# Altium PCB RHD2164_USBC.PcbDoc
Units mil, origin at the board's own origin, x right, y up, seen from the top; angles counter-clockwise.
Board outline 1036 x 1356 mil, 6 copper layers (Top Layer, Ground Plane 1, Third Layer, Fourth Layer, Ground Plane 2, Bottom Layer), stack 58.425 mil thick; 12 components, 76 nets, 224 pads, 85 vias.
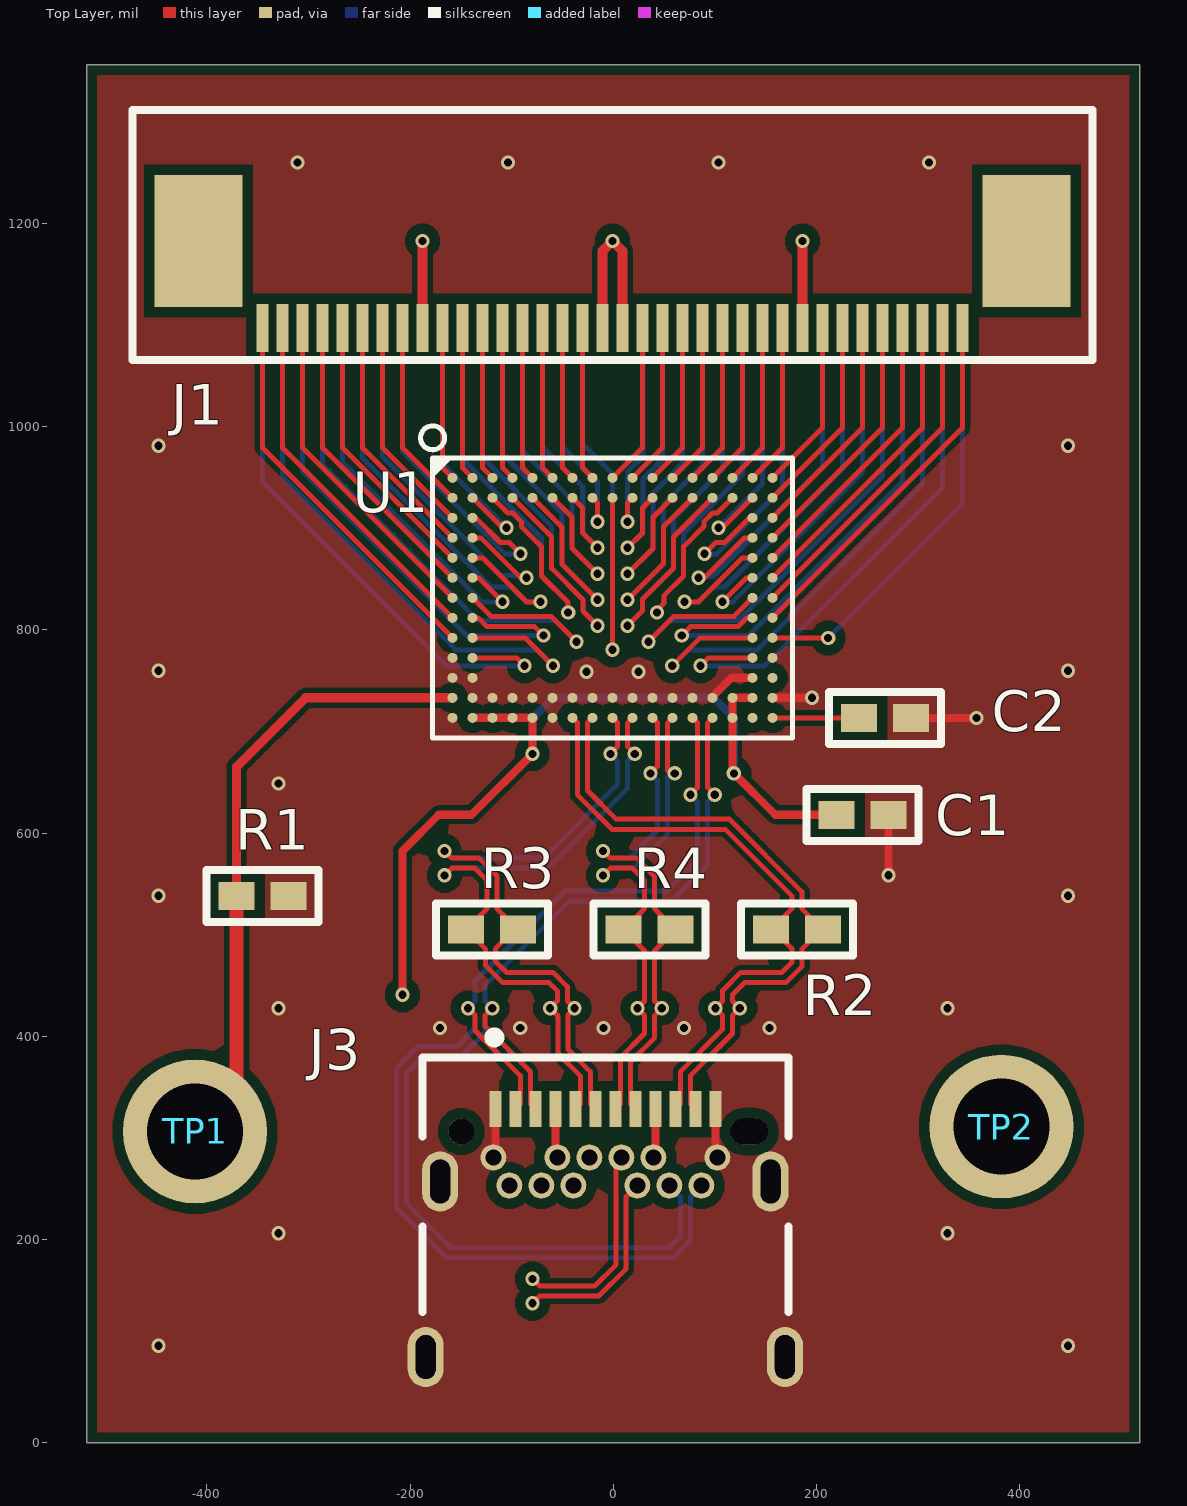
[diagram p0: Top Layer view]
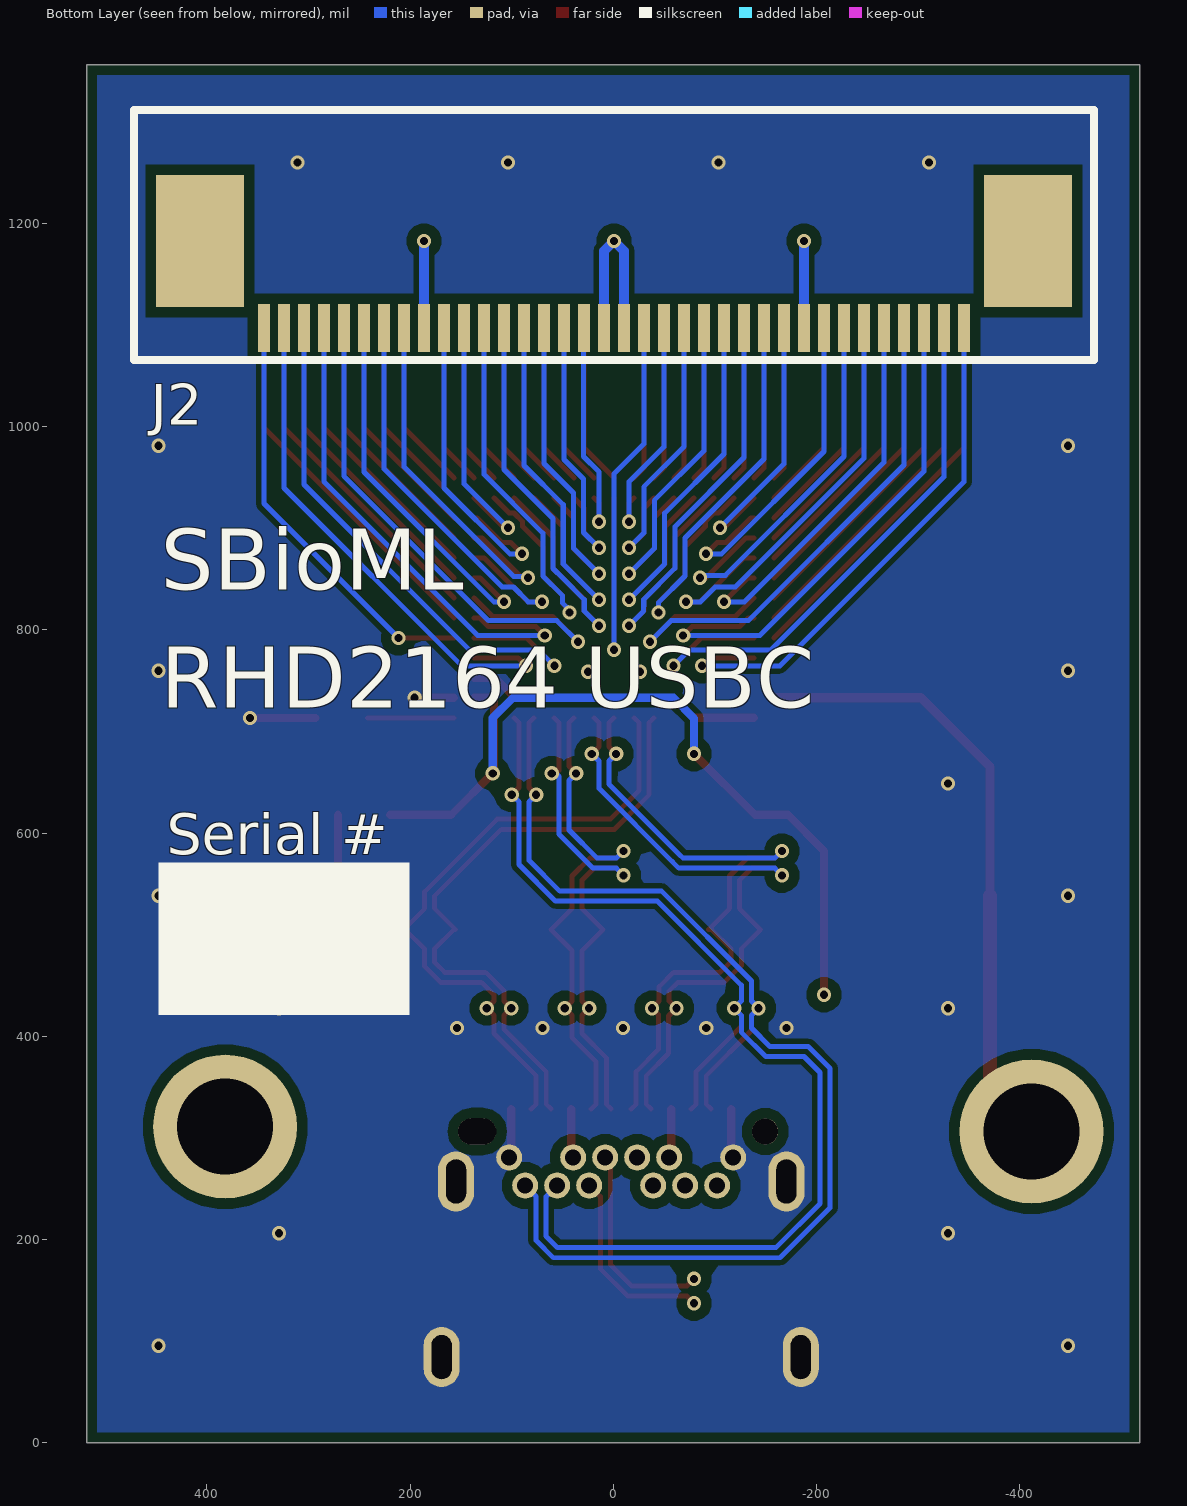
[diagram p1: Bottom Layer view, seen from below]
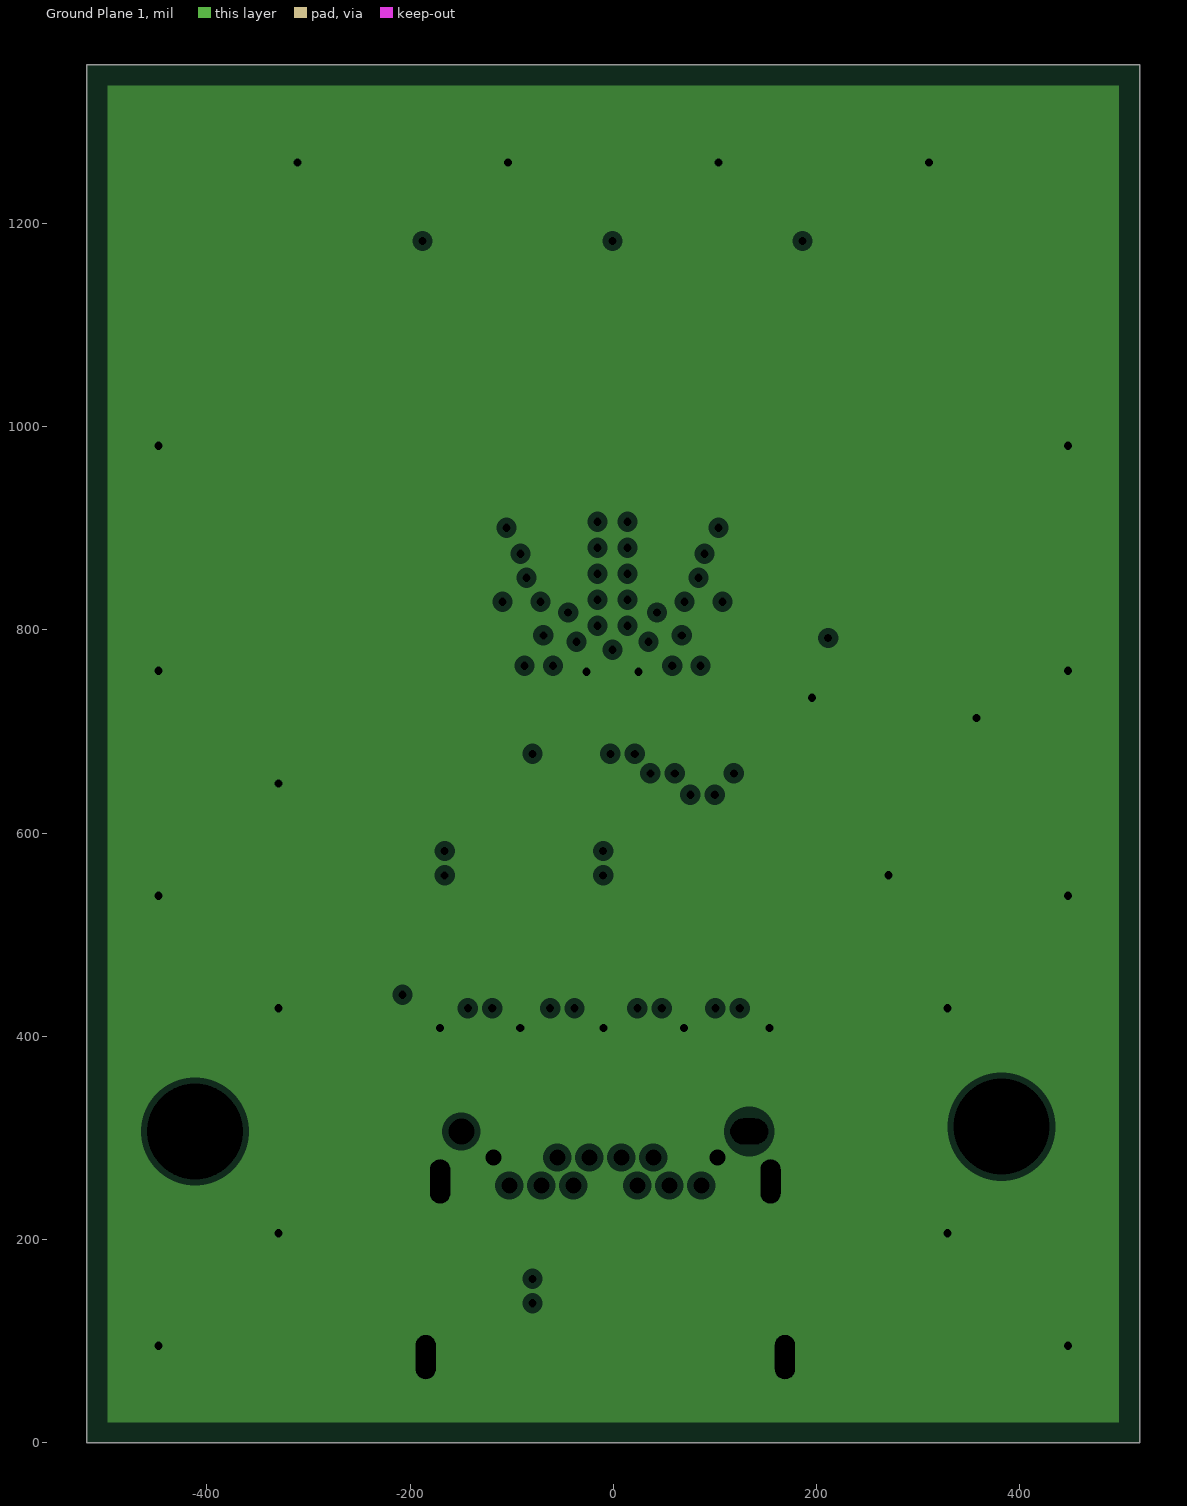
[diagram p2: Ground Plane 1, clearances drawn from the general rule]
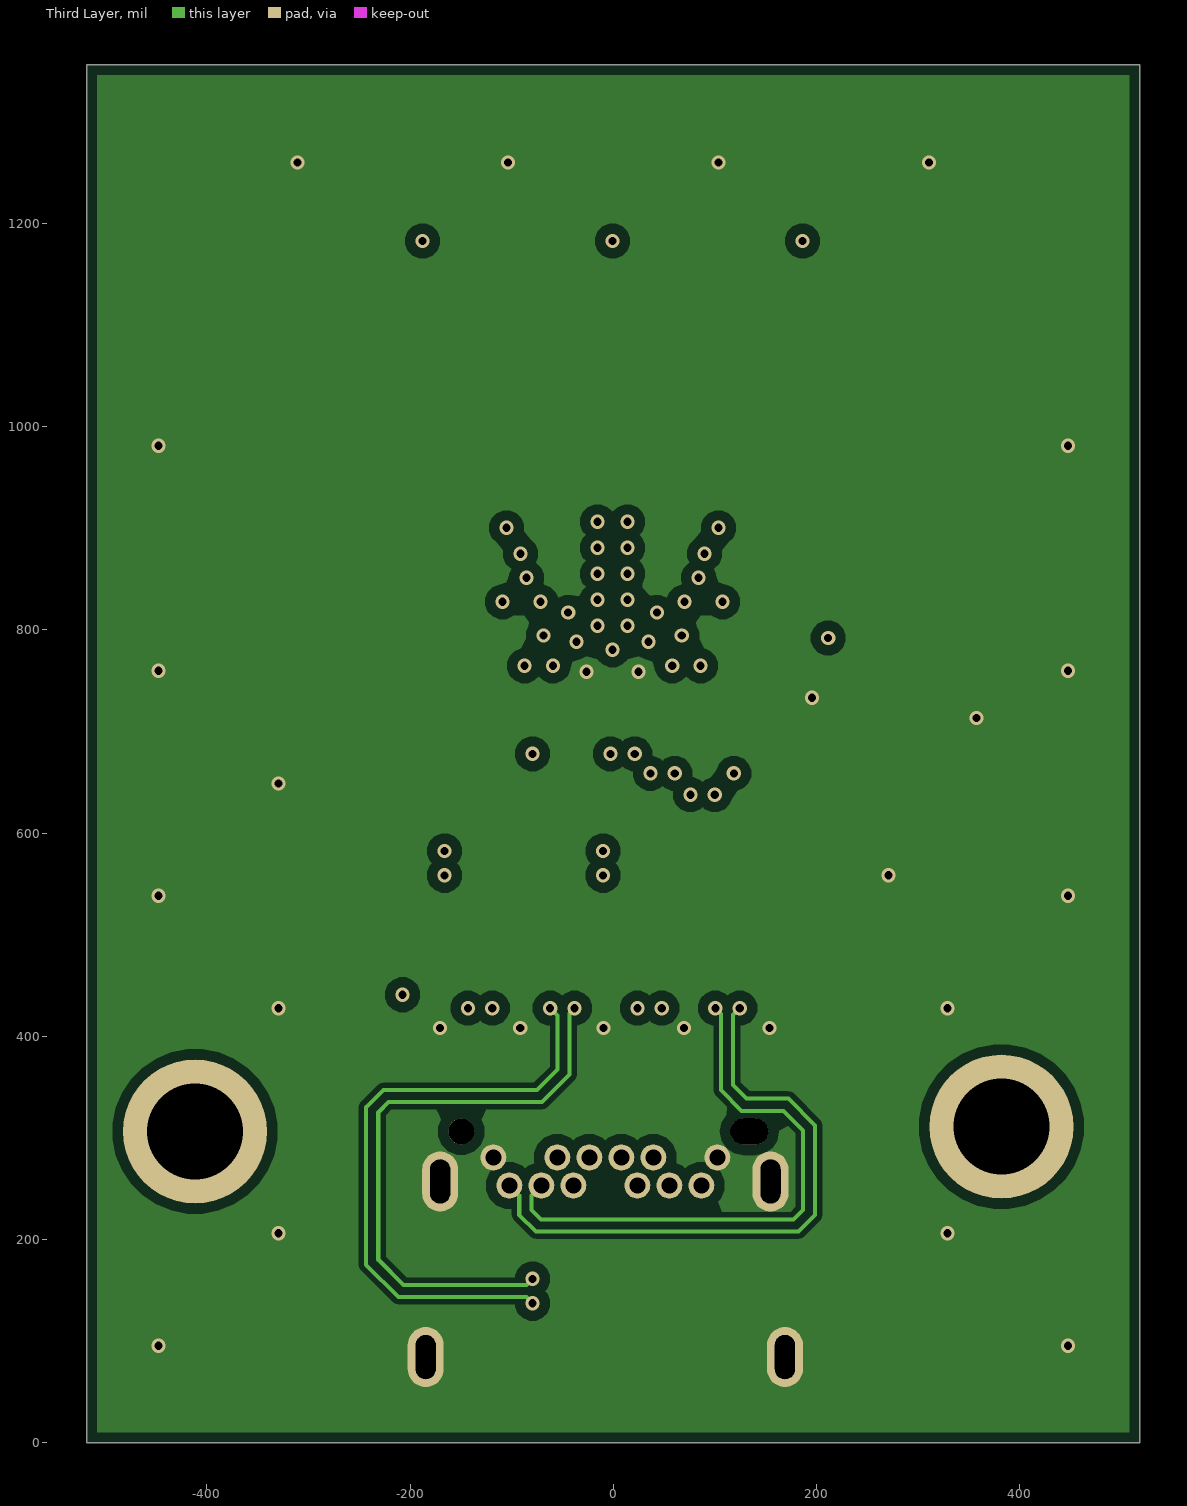
[diagram p3: Third Layer]
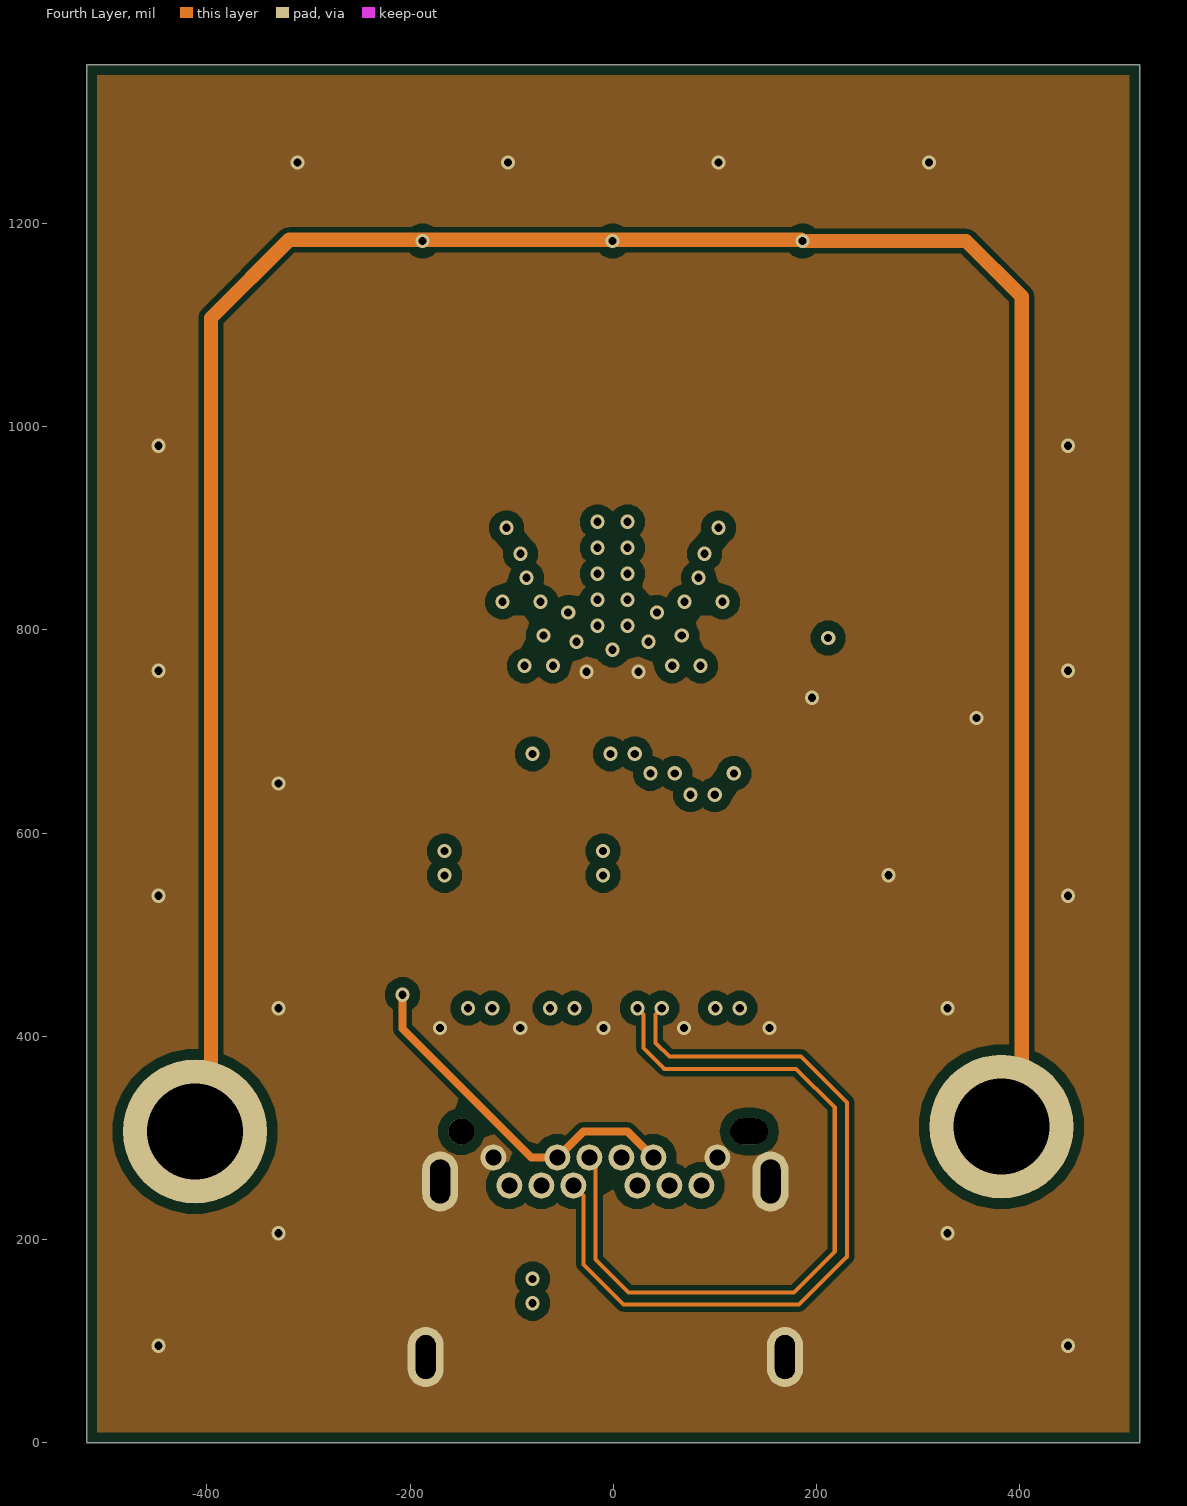
[diagram p4: Fourth Layer]
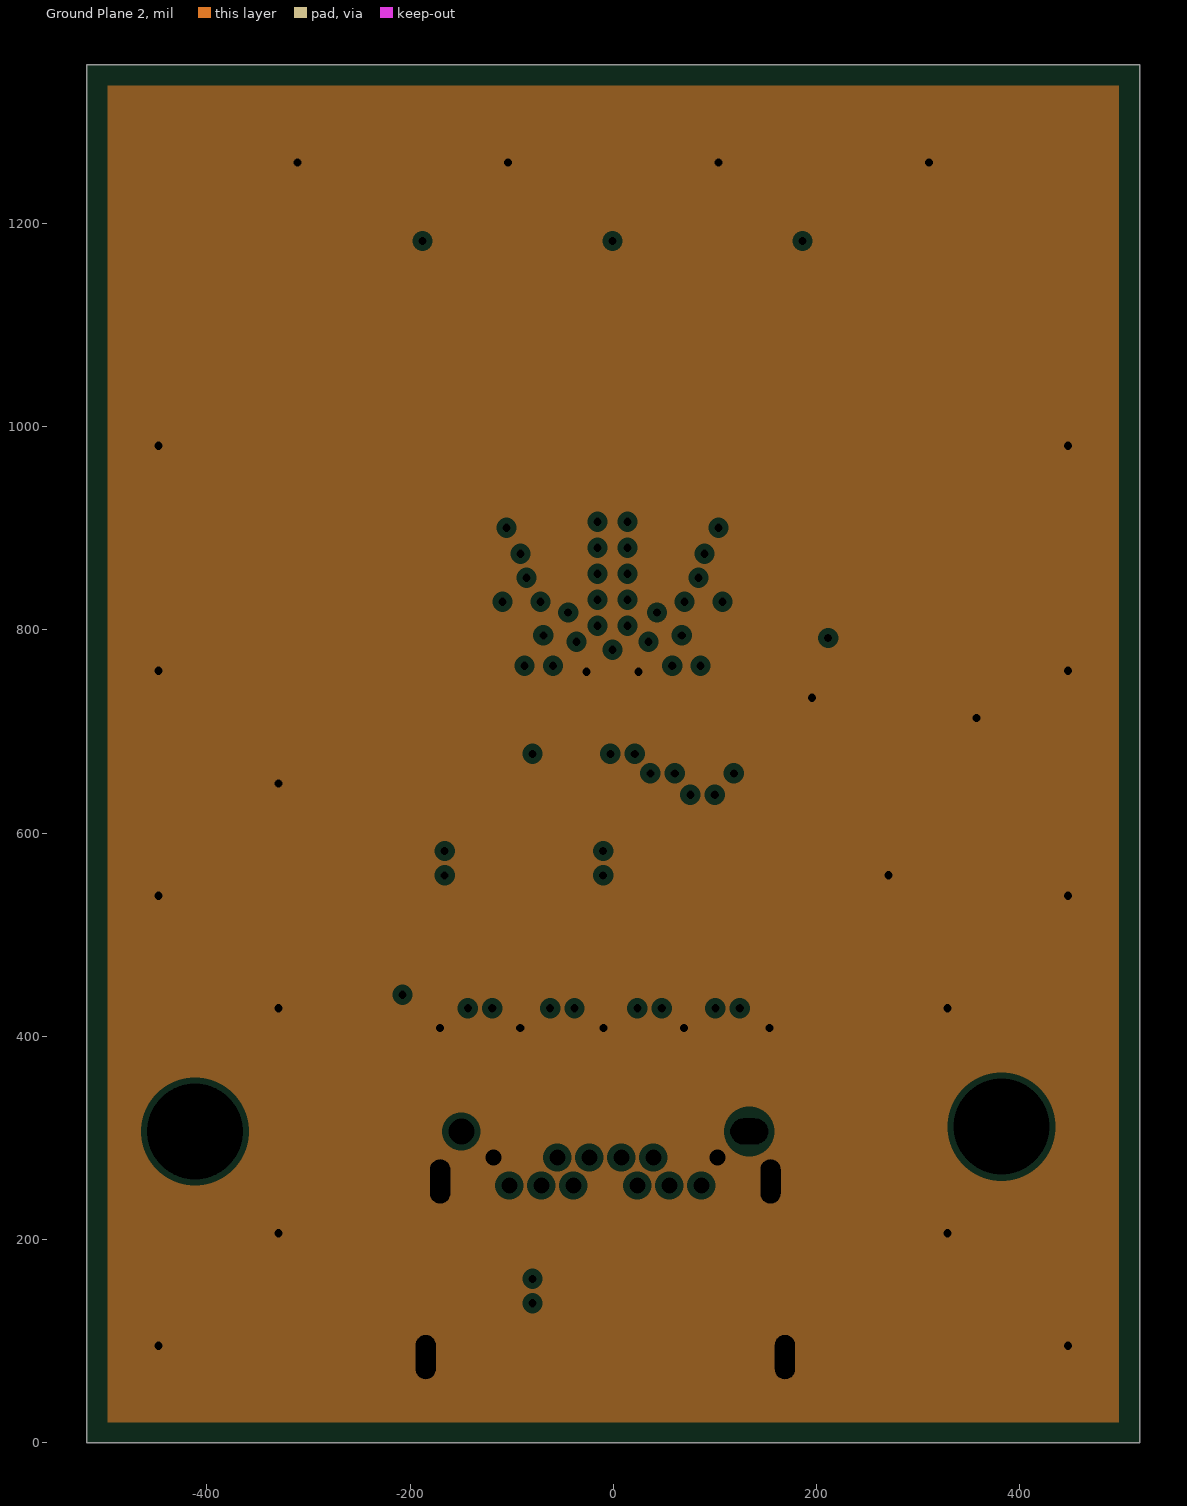
[diagram p5: Ground Plane 2, clearances drawn from the general rule]

## Layer stack, top to bottom
Top Solder: solder mask 0.3937, Solder Resist, Dk 3.5
Top Layer: signal copper 1.378
Dielectric 4: prepreg 4.7047, 2116 RC58%, Dk 4.45
Ground Plane 1: plane copper 1.378, net GND
Dielectric 2: core 16.929, Core, Dk 4.6
Third Layer: signal copper 1.378
Dielectric 1: prepreg 6.8898, 7628 RC46%, Dk 4.74
Fourth Layer: signal copper 1.378
Dielectric 3: core 16.929, Core, Dk 4.6
Ground Plane 2: plane copper 1.378, net GND
Dielectric 5: prepreg 4.7047, 2116 RC58%, Dk 4.45
Bottom Layer: signal copper 1.378
Bottom Solder: solder mask 0.3937, Solder Resist, Dk 3.5

## Board outline
-518,0 -518,1356 518,1356 518,0

## Design rules (kind name [scope] priority, off if disabled: settings)
AcuteAngle [All] p1: minimum=4.50000000000000E+0001 checktracksonly=FALSE
BoardOutlineClearance [All] p1: gap=10 ignorepadtopadclearanceinfootprint=FALSE
Clearance [All] p1: gap=10 ignorepadtopadclearanceinfootprint=TRUE except(5: Arc-Arc Arc-Track Arc-SMDPad Arc-THPad Arc-Via Arc-Fill Arc-Poly Arc-Region Arc-Text Arc-Hole Track-Track Track-SMDPad Track-THPad Track-Via Track-Fill Track-Poly Track-Region Track-Text Track-Hole)
ComponentClearance [All] p1: gap=4 collisioncheckmode=3 verticalgap=4 showdistances=FALSE
DiffPairsRouting [All] p1: maxlimit=8 minlimit=5 mostfreqgap=8 toplayer_maxgap=5 toplayer_prefgap=5 toplayer_minwidth=4.9 toplayer_maxwidth=4.9 toplayer_prefwidth=4.9 midlayer2_mingap=8 midlayer2_minwidth=4 midlayer2_maxwidth=4 midlayer2_prefwidth=4 midlayer3_mingap=8 midlayer3_minwidth=4 midlayer3_maxwidth=4 midlayer3_prefwidth=4 bottomlayer_maxgap=5 bottomlayer_prefgap=5 bottomlayer_minwidth=4.9 bottomlayer_maxwidth=4.9 bottomlayer_prefwidth=4.9 impedanceprofiledriven=TRUE impedanceprofileid={EA2CEC0D-C804-4875-A771-53543DD9646E} impedanceprofilevalue=100.000000 maxuncoupledlength=200
HoleSize [All] p1: absolutevalues=TRUE maxlimit=1000 minlimit=6 maxpercent=80.000 minpercent=20.000
HoleToHoleClearance [All] p1: gap=8 allowstackedmicrovias=FALSE
MatchedLengths [All] p1: tolerance=50 checknetsindiffpair=TRUE checkdiffpairvsdiffpair=FALSE checkxsignals=FALSE checkothers=FALSE
MinimumAnnularRing [All] p1: minimumring=3
MinimumSolderMaskSliver MinimumSolderMaskSliver_U1 [HasFootprint('RHD2164_BGA')] p1: minsoldermaskwidth=1
MinimumSolderMaskSliver [All] p2: minsoldermaskwidth=4
PlaneClearance [All] p1: clearance=6
PlaneConnect [All] p1: planeconnectstyle=Direct reliefexpansion=20 reliefentries=4 reliefconductorwidth=10 reliefairgap=10
PolygonConnect [All] p1: connectstyle=Direct reliefconductorwidth=8 reliefentries=4 polygonreliefangle="90 Angle" airgapwidth=4
RoutingVias [All] p1: holewidth=8 width=14 viastyle="Through Hole" minholewidth=6 minwidth=14 maxholewidth=8 maxwidth=14
SilkToSilkClearance [All] p1: silktosilkclearance=4
SilkToSolderMaskClearance [IsPad] p1: minsilkscreentomaskgap=2 clearancetoexposedcopper=FALSE
SolderMaskExpansion SolderMaskExpansion_Vias [IsVia] p1: expansion=-10 istentingtop=TRUE
SolderMaskExpansion [All] p2: expansion=2 istentingtop=FALSE
SupplyNets "Schematic Supply Nets_1" [InNet('GND')] p1: voltage=0.000
SupplyNets "Schematic Supply Nets" [InNet('VCC')] p2: voltage=0.000
Width Width_Power [InNetClass('Power')] p1: maxlimit=20 minlimit=6 preferedwidth=8
Width [All] p2: maxlimit=15 minlimit=5 preferedwidth=5 minimp=50.000000 maximp=50.000000 favimp=50.000000
21 further rules are at their usual default settings.

## Classes and differential pairs
component class RHD2164_USBC: C1 C2 J1 J2 J3 R1 R2 R3 R4 U1
differential pair RHD2216_SCLK: +RHD2216_SCLK_P -RHD2216_SCLK_N
differential pair RHD2216_MOSI: +RHD2216_MOSI_P -RHD2216_MOSI_N
differential pair RHD2216_MISO: +RHD2216_MISO_P -RHD2216_MISO_N
differential pair RHD2216_CSN: +RHD2216_CSN_P -RHD2216_CSN_N

## Components (designator, comment, footprint, x,y, rotation, side; value= is the part's Value field where it differs from the comment)
C1 "Value" 0402_CAPACITOR 245.37,618.03 r180 top
C2 "Value" 0402_CAPACITOR 267.51,713.15 r0 top
J1 "3-2492104-6" CON_ZIF_RA_36POS -0.69,1097.32 r180 top locked
J2 "3-2492104-6" CON_ZIF_RA_36POS -0.69,1097.32 r0 bottom locked
J3 "217183-0001" FP-217183-0001-MFG -7.82,178.94 r0 top locked
R1 "Value" 0402_Resistor -345.18,538.27 r180 top
R2 "Value" 0402_Resistor 180.69,505 r180 top
R3 "Value" 0402_Resistor -119.31,505 r0 top
R4 "Value" 0402_Resistor 35.69,505 r0 top
TP1 "TP_Small" TP_Small_M2 -411.68,306.3 r0 top
TP2 "TP_Small" TP_Small_M2 381.98,311.02 r0 top
U1 "Intan Technologies RHD2164 chip, BGA package (9x7mm 104-pin)" RHD2164_BGA -0.69,831.58 r0 top locked

## Footprints (in the part's own frame and the unit in brackets; to place one, negate y for a bottom-side part, rotate by r counter-clockwise, add the part's x,y. Pads: shape width x height; smd on the part's side, far side on the other; paste and mask are expansions set on the pad)
0402_CAPACITOR [mm]
  rect 0.9x0.7 smd: 1(-0.65,0) 2(0.65,0)
  silkscreen extent -1.4,-0.65 1.4,0.65
0402_Resistor [mm]
  rect 0.9x0.7 smd: 1(-0.65,0) 2(0.65,0)
  silkscreen extent -1.4,-0.65 1.4,0.65
CON_ZIF_RA_36POS [mm] "3-2492104-6 / 36 Position FPC Connector Contacts, Bottom 0.020\" (0.50mm) Surface Mount, Right Angle"
  rect 0.3x1.2 smd mask+0.025: 1(-8.75,0) 2(-8.25,0) 3(-7.75,0) 4(-7.25,0) 5(-6.75,0) 6(-6.25,0) 7(-5.75,0) 8(-5.25,0) 9(-4.75,0) 10(-4.25,0) 11(-3.75,0) 12(-3.25,0) 13(-2.75,0) 14(-2.25,0) 15(-1.75,0) 16(-1.25,0) 17(-0.75,0) 18(-0.25,0) 19(0.25,0) 20(0.75,0) 21(1.25,0) 22(1.75,0) 23(2.25,0) 24(2.75,0) 25(3.25,0) 26(3.75,0) 27(4.25,0) 28(4.75,0) 29(5.25,0) 30(5.75,0) 31(6.25,0) 32(6.75,0) 33(7.25,0) 34(7.75,0) 35(8.25,0) 36(8.75,0)
  rect 2.2x3.3 smd mask+0.025: M1(-10.35,-2.17) M2(10.35,-2.17)
  silkscreen extent -12,-5.45 12,0.8
FP-217183-0001-MFG [mm]
  rrect100% 0.9x1.5 hole 1.1 slot 0.5 at 0 deg paste-2539.97 mask+0: 1(-4.13,1.985) 2(4.13,1.985) 3(-4.49,-2.405) 4(4.49,-2.405)
  rect 0.3x0.9 smd paste+0 mask+0.025: A1(-2.75,3.795) A2(-2.25,3.795) A3(-1.75,3.795) A4(-1.25,3.795) A5(-0.75,3.795) A6(-0.25,3.795) A7(0.25,3.795) A8(0.75,3.795) A9(1.25,3.795) A10(1.75,3.795) A11(2.25,3.795) A12(2.75,3.795)
  round 0.65 hole 0.4 paste-2539.97 mask+0: B1(2.8,2.585) B2(2.4,1.885) B3(1.6,1.885) B4(1.2,2.585) B5(0.8,1.885) B6(0.4,2.585) B7(-0.4,2.585) B8(-0.8,1.885) B9(-1.2,2.585) B10(-1.6,1.885) B11(-2.4,1.885) B12(-2.8,2.585)
  round 0.65 hole 0.65 unplated paste-2539.97 mask+0: ""(-3.6,3.235)
  rrect100% 0.95x0.65 hole 0.65 slot 0.95 at 0 deg unplated paste-2539.97 mask+0: ""(3.6,3.235)
  silkscreen extent -4.57,-1.28 4.57,5.71, body extent -5.04,-5.19 5.04,5.19, height 0.25
RHD2164_BGA [mm]
  rrect100% 0.25x0.25 smd: A1(-4,3) A2(-3.5,3) A3(-3,3) A4(-2.5,3) A5(-2,3) A6(-1.5,3) A7(-1,3) A8(-0.5,3) A9(0,3) A10(0.5,3) A11(1,3) A12(1.5,3) A13(2,3) A14(2.5,3) A15(3,3) A16(3.5,3) A17(4,3) B1(-4,2.5) B2(-3.5,2.5) B3(-3,2.5) B4(-2.5,2.5) B5(-2,2.5) B6(-1.5,2.5) B7(-1,2.5) B8(-0.5,2.5) B9(0,2.5) B10(0.5,2.5) B11(1,2.5) B12(1.5,2.5) B13(2,2.5) B14(2.5,2.5) B15(3,2.5) B16(3.5,2.5) B17(4,2.5) C1(-4,2) C2(-3.5,2) C16(3.5,2) C17(4,2) D1(-4,1.5) D2(-3.5,1.5) D16(3.5,1.5) D17(4,1.5) E1(-4,1) E2(-3.5,1) E16(3.5,1) E17(4,1) F1(-4,0.5) F2(-3.5,0.5) F16(3.5,0.5) F17(4,0.5) G1(-4,0) G2(-3.5,0) G16(3.5,0) G17(4,0) H1(-4,-0.5) H2(-3.5,-0.5) H16(3.5,-0.5) H17(4,-0.5) J1(-4,-1) J2(-3.5,-1) J16(3.5,-1) J17(4,-1) K1(-4,-1.5) K2(-3.5,-1.5) K16(3.5,-1.5) K17(4,-1.5) L1(-4,-2) L2(-3.5,-2) L16(3.5,-2) L17(4,-2) M1(-4,-2.5) M2(-3.5,-2.5) M3(-3,-2.5) M4(-2.5,-2.5) M5(-2,-2.5) M6(-1.5,-2.5) M7(-1,-2.5) M8(-0.5,-2.5) M9(0,-2.5) M10(0.5,-2.5) M11(1,-2.5) M12(1.5,-2.5) M13(2,-2.5) M14(2.5,-2.5) M15(3,-2.5) M16(3.5,-2.5) M17(4,-2.5) N1(-4,-3) N2(-3.5,-3) N3(-3,-3) N4(-2.5,-3) N5(-2,-3) N6(-1.5,-3) N7(-1,-3) N8(-0.5,-3) N9(0,-3) N10(0.5,-3) N11(1,-3) N12(1.5,-3) N13(2,-3) N14(2.5,-3) N15(3,-3) N16(3.5,-3) N17(4,-3)
  silkscreen extent -4.8,-3.5 4.5,4.3
TP_Small_M2 [mm]
  round 3.6 hole 2.4: 1(0,0)

## Part data
C1 C2: library part Capacitor, "Capacitor"
J1 J2: library part CON_ZIF_RA_36POS, "36 Position FPC Connector Contacts, Bottom 0.020\" (0.50mm) Surface Mount, Right Angle", GRAMS Lib Spec=2.7
J3: library part CON_USBC_TH_SMT, "USB-C (USB TYPE-C) USB 3.2 Gen 1 (USB 3.1 Gen 1, Superspeed (USB 3.0)) Receptacle Connector 24 Position Through Hole, Right Angle"
R1 R2 R3 R4: library part Resistor, "Resistor", GRAMS Lib Spec=2.7
U1: library part RHD2164_BGA_BGA, Package=BGA104_9X7, DeviceName=_BGA, DeviceSetName=RHD2164_BGA, GateName_1=A, LibraryName=RHD2000, SymbolName_1=RHD2164_BGA

## Via types
v1: diameter 14/14/14/14 (per signal layer), hole 8, Top Layer to Bottom Layer, tented both sides, 46 vias
v2: diameter 14, hole 8, Top Layer to Bottom Layer, tented both sides, 39 vias

## Nets (pads, with @x,y where several pads share a name; then routed paths per layer and width w, separated by ;. In a path a pad name is that pad's centre, name@x,y a point inside that pad or via, vN(x,y) a via of type N, cw(c..) or ccw(c..) an arc to the next point about the centre after c; other vN are vias at no path point)
GND: C1.1 C2.2 J3.1 J3.2 J3.3 J3.4 J3.A1 J3.A12 J3.B1 J3.B12 R1.1 U1.K1 U1.K17 U1.L1 U1.L2 U1.L16 U1.M2 U1.M3 U1.M4 U1.M5 U1.M6 U1.M7 U1.M8 U1.M9 U1.M10 U1.M11 U1.M12 U1.M13 U1.M14 U1.M17 U1.N1 U1.N6 | length 307.7
  Top Layer w8: J3.B12 -116.09,282.68 J3.A1 ; U1.M14 97.74,734.23 116.35,752.84 U1.L16 ; J3.A12 100.45,282.68 J3.B1 ; U1.M17 v2(195.51,733.15) ; v2(270.96,558.47) C1.1 ; C2.2 v2(357.51,713.15)
  other v1: -447.54,95.35 -329.43,206.1 -329.43,427.64 -447.54,538.27 -329.43,648.9 -26.28,758.74 24.9,758.75 -447.54,759.72 447.54,759.72 -447.54,981.18 447.54,981.18 -310.8,1260 -103.6,1260 103.6,1260 310.8,1260
  other v2: 447.54,95.35 329.03,206.1 -170.42,408.15 -91.51,408.15 -9.59,408.15 69.55,408.15 153.81,408.15 329.03,427.64 447.54,538.27
INPUT_01: J2.1 U1.K2 | length 538.9
  Top Layer w5: U1.K2 -95.18,772.52 v1(-87.31,764.66)
  Bottom Layer w5: J2.1 -345.18,945.79 -164.04,764.66 v1(-87.31,764.66)
INPUT_02: J1.36 U1.J1 | length 382.6
  Top Layer w5: J1.36 -345.18,979.22 U1.J1
INPUT_03: J2.2 U1.J2 | length 580.3
  Top Layer w5: U1.J2 -86.95,792.21 v1(-59.39,764.66)
  Bottom Layer w5: J2.2 -325.5,950.73 -155.16,780.39 -75.13,780.39 v1(-59.39,764.66)
INPUT_04: J1.35 U1.H1 | length 354.7
  Top Layer w5: J1.35 -325.5,979.21 U1.H1
INPUT_05: J2.3 U1.H2 | length 522
  Top Layer w5: U1.H2 -132.94,811.89 -124.2,803.15 -77.38,803.15 v1(-68.81,794.58)
  Bottom Layer w5: J2.3 -305.81,956.16 -144.23,794.58 v1(-68.81,794.58)
INPUT_06: J1.34 U1.G1 | length 326.9
  Top Layer w5: J1.34 -305.81,979.22 U1.G1
INPUT_07: J2.4 U1.G2 | length 577.4
  Top Layer w5: U1.G2 -120.06,813.15 -61,813.15 v1(-36.13,788.28)
  Bottom Layer w5: J2.4 -286.13,962.38 -132.83,809.08 -74.81,809.08 -56.93,809.08 v1(-36.13,788.28)
INPUT_08: J1.33 U1.F1 | length 299.1
  Top Layer w5: J1.33 -286.13,979.22 U1.F1
INPUT_09: J2.5 U1.F2 | length 386
  Top Layer w5: U1.F2 -132.59,851.27 v1(-108.97,827.65)
  Bottom Layer w5: J2.5 -266.44,964.93 -129.16,827.65 v1(-108.97,827.65)
INPUT_10: J1.32 U1.E1 | length 271.2
  Top Layer w5: J1.32 -266.44,979.22 U1.E1
INPUT_11: J2.6 U1.E2 | length 447
  Top Layer w5: U1.E2 -128.65,870.95 -85.34,827.65 v1(-71.56,827.65)
  Bottom Layer w5: J2.6 -246.76,968.89 -120.02,842.15 -100.38,842.15 -85.88,827.65 v1(-71.56,827.65)
INPUT_12: J1.31 U1.D1 | length 243.4
  Top Layer w5: J1.31 -246.76,979.22 U1.D1
INPUT_13: J2.7 U1.D2 | length 387.4
  Top Layer w5: U1.D2 -130.56,890.64 -91.19,851.27 v1(-85.34,851.27)
  Bottom Layer w5: J2.7 -227.07,970.55 -110.25,853.73 -87.8,853.73 v1(-85.34,851.27)
INPUT_14: J1.30 U1.C1 | length 215.5
  Top Layer w5: J1.30 -227.07,979.22 U1.C1
INPUT_15: J2.8 U1.C2 | length 341.5
  Top Layer w5: U1.C2 -135.37,910.32 -111.03,885.98 -102.34,885.98 v1(-91.25,874.89)
  Bottom Layer w5: J2.8 -207.39,975.59 -106.69,874.89 v1(-91.25,874.89)
INPUT_16: J1.29 U1.B1 | length 187.7
  Top Layer w5: J1.29 -207.39,979.22 U1.B1
INPUT_17: J1.27 U1.A1 | length 151.7
  Top Layer w5: J1.27 -168.02,959.53 U1.A1
INPUT_18: J2.10 U1.B2 | length 268.6
  Top Layer w5: U1.B2 -108.97,900.48 v1(-105.03,900.48)
  Bottom Layer w5: J2.10 -168.02,963.47 v1(-105.03,900.48)
INPUT_19: J1.26 U1.A2 | length 151.7
  Top Layer w5: J1.26 -148.33,959.53 U1.A2
INPUT_20: J2.11 U1.B3 | length 469.9
  Top Layer w5: U1.B3 -103.78,914.98 -99.02,914.98 -90.53,906.49 -90.53,901.74 -70.63,881.84 -70.63,853.13 -44.38,826.88 -44.38,819.47 v1(-44.38,817.04)
  Bottom Layer w5: J2.11 -148.33,968.16 -70.67,890.5 -70.67,853.08 -44.38,826.79 -44.38,819.52 v1(-44.38,817.04)
INPUT_21: J1.25 U1.A3 | length 151.7
  Top Layer w5: J1.25 -128.65,959.53 U1.A3
INPUT_22: J2.12 U1.B4 | length 500.8
  Top Layer w5: U1.B4 -60.63,891.52 -60.63,860.65 -29.96,829.97 -29.96,818.53 v1(-15.46,804.03)
  Bottom Layer w5: J2.12 -128.65,969.56 -60.67,901.59 -60.67,860.72 -60.62,860.67 -29.96,829.97 -29.96,823.61 -29.88,823.53 -29.88,818.5 v1(-15.46,804.03)
INPUT_23: J1.24 U1.A4 | length 151.7
  Top Layer w5: J1.24 -108.96,959.53 U1.A4
INPUT_24: J2.13 U1.B5 | length 433.3
  Top Layer w5: U1.B5 -78.77,929.35 -50.63,901.21 -50.63,864.79 v1(-15.46,829.62)
  Bottom Layer w5: J2.13 -108.96,973.21 -50.62,914.87 -50.62,864.78 v1(-15.46,829.62)
INPUT_25: J1.23 U1.A5 | length 151.7
  Top Layer w5: J1.23 -89.28,959.53 U1.A5
INPUT_26: J2.14 U1.B6 | length 365.8
  Top Layer w5: U1.B6 -40.43,910.69 -40.43,880.18 v1(-15.46,855.21)
  Bottom Layer w5: J2.14 -89.28,976.31 -40.45,927.48 -40.45,880.19 v1(-15.46,855.21)
INPUT_27: J1.22 U1.A6 | length 151.7
  Top Layer w5: J1.22 -69.59,959.53 U1.A6
INPUT_28: J2.15 U1.B7 | length 298.3
  Top Layer w5: U1.B7 -30.13,920.08 -30.13,895.47 v1(-15.46,880.8)
  Bottom Layer w5: J2.15 -69.59,980.3 -30.08,940.79 -30.08,895.42 v1(-15.46,880.8)
INPUT_29: J1.21 U1.A7 | length 151.7
  Top Layer w5: J1.21 -49.91,959.53 U1.A7
INPUT_30: J2.16 U1.B8 | length 230.9
  Top Layer w5: U1.B8 -15.46,925.09 v1(-15.46,906.39)
  Bottom Layer w5: J2.16 -49.91,980.24 -15.46,945.79 v1(-15.46,906.39)
INPUT_31: J1.20 U1.A8 | length 151.7
  Top Layer w5: J1.20 -30.22,959.53 U1.A8
INPUT_32: J2.17 U1.B9 | length 478.8
  Top Layer w5: v1(-0.69,780.39) U1.B9
  Bottom Layer w5: J2.17 -30.22,983.15 -0.69,953.63 v1(-0.69,780.39)
INPUT_33: J1.17 U1.A9 | length 159.9
  Top Layer w5: U1.A9 28.83,979.22 J1.17
INPUT_34: J1.16 U1.A10 | length 159.9
  Top Layer w5: U1.A10 48.52,979.21 J1.16
INPUT_35: J2.20 U1.B10 | length 223
  Top Layer w5: v1(14.08,906.39) 14.08,925.09 U1.B10
  Bottom Layer w5: v1(14.08,906.39) 14.08,955.55 29.23,970.7 29.23,1096.92 J2.20
INPUT_36: J1.15 U1.A11 | length 159.9
  Top Layer w5: U1.A11 68.2,979.22 J1.15
INPUT_37: J2.21 U1.B11 | length 290.2
  Top Layer w5: v1(14.08,880.8) 28.75,895.47 28.75,920.08 U1.B11
  Bottom Layer w5: v1(14.08,880.8) 29.23,895.96 29.23,948.42 48.52,967.7 J2.21
INPUT_38: J1.14 U1.A12 | length 159.9
  Top Layer w5: U1.A12 87.89,979.21 J1.14
INPUT_39: J2.22 U1.B12 | length 357.7
  Top Layer w5: v1(14.08,855.21) 39.05,880.18 39.05,910.69 U1.B12
  Bottom Layer w5: v1(14.08,855.21) 39.23,880.37 39.23,934.69 68.2,963.66 J2.22
INPUT_40: J1.13 U1.A13 | length 159.9
  Top Layer w5: U1.A13 107.57,979.22 J1.13
INPUT_41: J2.23 U1.B13 | length 425.2
  Top Layer w5: v1(14.07,829.62) 49.25,864.79 49.25,901.21 77.39,929.35 U1.B13
  Bottom Layer w5: v1(14.07,829.62) 49.23,864.78 49.23,923.22 87.89,961.87 J2.23
INPUT_42: J1.12 U1.A14 | length 159.9
  Top Layer w5: U1.A14 127.26,979.21 J1.12
INPUT_43: J2.24 U1.B14 | length 492.7
  Top Layer w5: v1(14.08,804.03) 28.58,818.53 28.58,829.97 59.25,860.65 59.25,891.52 U1.B14
  Bottom Layer w5: v1(14.08,804.03) 28.57,818.51 28.57,829.71 49.35,850.49 ; 49.35,850.54 59.29,860.48 59.29,909.54 107.57,957.83 J2.24
INPUT_44: J1.11 U1.A15 | length 159.9
  Top Layer w5: U1.A15 146.94,979.22 J1.11
INPUT_45: J2.25 U1.B15 | length 461.8
  Top Layer w5: v1(43,817.04) 43,819.47 50.1,826.57 50.1,833.98 69.25,853.13 69.25,881.84 89.14,901.74 89.14,906.49 97.64,914.98 102.39,914.98 U1.B15
  Bottom Layer w5: v1(43,817.04) 43,819.56 50.14,826.7 50.14,833.97 69.29,853.12 69.29,895.19 127.26,953.16 J2.25
INPUT_46: J1.10 U1.A16 | length 159.9
  Top Layer w5: U1.A16 166.63,979.21 J1.10
INPUT_47: J2.26 U1.B16 | length 260.5
  Top Layer w5: v1(103.64,900.48) 107.58,900.48 U1.B16
  Bottom Layer w5: v1(103.64,900.48) 146.94,943.78 J2.26
INPUT_48: J1.8 U1.A17 | length 168
  Top Layer w5: U1.A17 206,998.9 J1.8
INPUT_49: J1.7 U1.B17 | length 195.9
  Top Layer w5: U1.B17 225.69,998.91 J1.7
INPUT_50: J2.27 U1.C16 | length 323.2
  Top Layer w5: v1(89.86,874.89) 100.95,885.98 109.65,885.98 133.99,910.32 U1.C16
  Bottom Layer w5: v1(89.86,874.89) 101.83,874.89 166.63,939.7 J2.27
INPUT_51: J1.6 U1.C17 | length 223.7
  Top Layer w5: U1.C17 245.37,998.9 J1.6
INPUT_52: J2.29 U1.D16 | length 371.6
  Top Layer w5: v1(83.96,851.27) 89.8,851.27 129.17,890.64 U1.D16
  Bottom Layer w5: v1@85.29,852.61 98.04,852.61 206,960.56 J2.29
INPUT_53: J1.5 U1.D17 | length 251.5
  Top Layer w5: U1.D17 265.06,998.91 J1.5
INPUT_54: J2.30 U1.E16 | length 433.4
  Top Layer w5: v1(70.18,827.65) 83.96,827.65 127.26,870.95 U1.E16
  Bottom Layer w5: v1(70.18,827.65) 83.78,827.65 98.28,842.15 109.36,842.15 225.69,958.47 J2.30
INPUT_55: J1.4 U1.E17 | length 279.4
  Top Layer w5: U1.E17 284.74,998.9 J1.4
INPUT_56: J2.31 U1.F16 | length 371.9
  Top Layer w5: v1(107.58,827.65) 131.2,851.27 U1.F16
  Bottom Layer w5: v1(107.58,827.65) 117.58,827.65 245.37,955.44 J2.31
INPUT_57: J1.3 U1.F17 | length 307.2
  Top Layer w5: U1.F17 304.43,998.91 J1.3
INPUT_58: J2.32 U1.G16 | length 564.2
  Top Layer w5: v1(34.74,788.28) 59.62,813.15 118.67,813.15 U1.G16
  Bottom Layer w5: v1(34.74,788.28) 55.54,809.08 73.43,809.08 122.82,809.08 265.06,951.31 J2.32
INPUT_59: J1.2 U1.G17 | length 335.1
  Top Layer w5: U1.G17 324.11,998.9 J1.2
INPUT_60: J2.33 U1.H16 | length 508.3
  Top Layer w5: v1(67.42,794.58) 75.99,803.15 122.82,803.15 131.56,811.89 U1.H16
  Bottom Layer w5: v1(67.42,794.58) 133.46,794.58 284.74,945.86 J2.33
INPUT_61: J1.1 U1.H17 | length 362.9
  Top Layer w5: U1.H17 343.8,998.9 J1.1
INPUT_62: J2.34 U1.J16 | length 565.1
  Top Layer w5: v1(58.01,764.66) 85.56,792.21 U1.J16
  Bottom Layer w5: v1(58.01,764.66) 73.75,780.39 141.84,780.39 304.43,942.98 J2.34
INPUT_63: J2.36 U1.J17 | length 414.9
  Top Layer w5: U1.J17 211.31,792.21 v2(211.51,792.01)
  Bottom Layer w5: v2(211.51,792.01) 343.8,924.3 J2.36
INPUT_64: J2.35 U1.K16 | length 522.7
  Top Layer w5: v1(85.93,764.66) 93.79,772.52 U1.K16
  Bottom Layer w5: v1(85.93,764.66) 149.01,764.66 324.11,939.75 J2.35
NetC2_1: C2.1 U1.N17 | length 85.3
  Top Layer w5: U1.N17 241.6,713.47 C2.1
REF: J1.9 J1.18 J1.19 J1.28 J2.9 J2.18 J2.19 J2.28 R1.2 TP1.1 TP2.1 U1.M1 | length 3782.8
  Top Layer w9: R1.2 -370.77,665.23 -302.85,733.15 U1.M1
  Top Layer w10: J1.28 v2(-187.7,1182.76) ; J1.19 -10.54,1172.91 v2(-0.69,1182.76) 9.15,1172.91 J1.18 ; J1.9 v2(186.32,1182.76)
  Top Layer w14: TP1.1@-374.02,311.02 -370.77,314.27 R1.2
  Fourth Layer w14: TP1.1@-374.02,311.02 -396,333.01 -396,1107 -319,1184 185.07,1184 v2(186.32,1182.76) 347.24,1182.76 402,1128 402,339.01 TP2.1@374.02,311.02
  Bottom Layer w10: J2.9 v2(-187.7,1182.76) ; J2.18 -10.54,1172.91 v2(-0.69,1182.76) 9.15,1172.91 J2.19 ; J2.28 v2(186.32,1182.76)
RHD2216_CSN_N: J3.A10 J3.B10 R2.2 U1.N7 | length 1194.7
  Top Layer w4.9: U1.N7 -35.32,708.72 -35.32,637.78 -1.29,603.75 110.25,603.75 175.74,538.27 175.74,525.64 R2.2 ; J3.A10 65.97,333.24 65.97,365.25 107.53,406.81 107.53,420.59 v2(100.48,427.64) 107.53,434.69 107.53,444.96 125.52,462.95 166,462.95 175.95,472.9 175.95,486 R2.2@156.95,505
  Third Layer w4: J3.B10 -80.56,243.4 -80.56,229.15 -71.27,219.86 177.4,219.86 186.69,229.15 186.69,307.42 167.44,326.66 126.25,326.66 106,346.91 106,422.11 v2(100.48,427.64)
RHD2216_CSN_P: J3.A11 J3.B11 R2.1 U1.N8 | length 1235
  Top Layer w4.9: U1.N8 -25.42,708.44 -25.42,641.88 2.81,613.65 114.35,613.65 185.64,542.37 185.64,525.64 R2.1 ; J3.A11 75.87,333.24 75.87,361.15 117.43,402.71 117.43,420.59 v2(124.48,427.64) 117.43,434.69 117.43,440.86 129.62,453.05 170.1,453.05 185.85,468.8 185.85,486 R2.1@204.85,505
  Third Layer w4: J3.B11 -92.56,243.4 -92.56,224.18 -76.24,207.86 182.37,207.86 195.17,220.66 198.69,224.18 198.69,312.39 172.41,338.66 131.22,338.66 118,351.88 118,421.16 v2(124.48,427.64)
RHD2216_MISO_N: J3.A2 J3.B2 U1.N13 | length 1197.5
  Top Layer w4.9: v2(-143.07,427.64) -136.02,420.59 -136.02,405.77 -91.51,361.25 -91.51,333.24 J3.A2 ; v2(75.89,637.78) 82.94,644.83 82.94,708.57 U1.N13
  Bottom Layer w4.9: v2(75.89,637.78) 82.94,630.73 82.94,573.16 52.68,542.9 -47.59,542.9 -136.02,454.47 -136.02,434.69 v2(-143.07,427.64) -136.02,420.59 -136.02,408.15 -154.17,390 -191.8,390 -213.31,368.49 -213.31,231.15 -164.18,182.01 59,182.01 76.07,199.08 76.07,242.55 J3.B2
RHD2216_MISO_P: J3.A3 J3.B3 U1.N14 | length 1164.8
  Top Layer w4.9: v2(-119.07,427.64) -126.12,420.59 -126.12,409.87 -81.61,365.35 -81.61,333.24 J3.A3 ; U1.N14 92.84,708.57 92.84,644.83 v2(99.89,637.78)
  Bottom Layer w4.9: J3.B3 66.17,242.16 66.17,203.18 54.9,191.91 -160.08,191.91 -203.41,235.25 -203.41,364.39 -187.7,380.1 -150.07,380.1 -126.12,404.05 -126.12,420.59 v2(-119.07,427.64) -126.12,434.69 -126.12,450.37 -43.49,533 56.78,533 92.84,569.06 92.84,630.73 v2(99.89,637.78)
RHD2216_MOSI_N: J3.A8 J3.B8 R4.2 U1.N11 | length 1289.5
  Top Layer w4.9: v2(-10,582.42) -2.95,575.37 23.08,575.37 40.64,557.81 40.64,525.64 R4.2 40.68,484.4 40.68,434.69 v2(47.73,427.64) 40.68,420.59 40.68,398.6 16.78,374.71 16.78,333.28 J3.A8 ; v2(36.52,658.8) 43.57,665.85 43.57,708.57 U1.N11
  Fourth Layer w4: J3.B8 -29.47,243.31 -29.47,175.56 6.57,139.51 10.09,136 182.97,136 230,183.03 230,334.97 184.97,380 55.17,380 41.73,393.45 41.73,421.64 v2(47.73,427.64)
  Bottom Layer w4.9: v2(-10,582.42) -2.95,575.37 15.89,575.37 43.57,603.05 43.57,651.75 v2(36.52,658.8)
RHD2216_MOSI_P: J3.A7 J3.B7 R4.1 U1.N12 | length 1280.6
  Top Layer w4.9: v2(-10,558.42) -2.95,565.47 18.98,565.47 30.74,553.71 30.74,525.64 R4.1 30.78,484.32 30.78,434.69 v2(23.73,427.64) 30.78,420.59 30.78,402.71 6.88,378.81 6.88,333.2 J3.A7 ; U1.N12 53.47,708.57 53.47,661.75 57.57,661.75 v2(60.52,658.8)
  Fourth Layer w4: J3.B7 -17.47,274.61 -17.47,263.54 -17.47,242.75 -17.47,180.53 15.06,148 178,148 218,188 218,330 180,368 50.2,368 29.73,388.47 29.73,421.64 v2(23.73,427.64)
  Bottom Layer w4.9: v2(-10,558.42) -2.95,565.47 20,565.47 53.47,598.95 53.47,655.85 56.42,658.8 v2(60.52,658.8)
RHD2216_SCLK_N: J3.A6 J3.B6 R3.2 U1.N9 | length 1439.7
  Top Layer w4.9: v2(-166,582.42) -158.95,575.37 -131.92,575.37 -114.36,557.81 -114.36,525.64 R3.2 -97.09,505 -116.09,486 -116.09,474 -104.79,462.7 -59.1,462.7 -45.16,448.77 -45.16,434.69 v2(-38.11,427.64) -44.5,421.25 -44.5,387.2 -22.55,365.25 -22.55,333.24 J3.A6 ; v2(-79.43,161.25) -72.38,154.2 -18.26,154.2 2.79,175.25 2.79,275.56 J3.B6 ; v2(-2.85,678) 4.2,685.05 4.2,708.57 U1.N9
  Third Layer w4: v2(-79.43,161.25) -85.46,155.22 -206.47,155.22 -231.31,180.07 -231.31,325.15 -221.31,335.15 -70.14,335.15 -43.06,362.23 -43.06,422.69 v2(-38.11,427.64)
  Bottom Layer w4.9: v2(-166,582.42) -158.95,575.37 -68.63,575.37 ; -66.58,577.42 4.2,648.2 4.2,670.95 v2(-2.85,678)
RHD2216_SCLK_P: J3.A5 J3.B5 R3.1 U1.N10 | length 1451.7
  Top Layer w4.9: v2(-166,558.42) -158.95,565.47 -136.02,565.47 -124.26,553.71 -124.26,525.64 R3.1 -125.99,486.08 -125.99,469.9 -108.89,452.8 -63.2,452.8 -55.06,444.67 -55.06,434.69 v2(-62.11,427.64) -54.4,419.93 -54.4,383.1 -32.45,361.15 -32.45,333.24 J3.A5 ; v2(-79.43,137.25) -72.38,144.3 -14.16,144.3 12.69,171.15 12.69,242.16 J3.B5 ; U1.N10 14.1,708.57 14.1,685.05 v2(21.15,678)
  Third Layer w4: v2(-79.43,137.25) -85.4,143.22 -211.44,143.22 -243.31,175.1 -243.31,330.12 -226.29,347.15 -75.11,347.15 -55.06,367.2 -55.06,420.59 v2(-62.11,427.64)
  Bottom Layer w4.9: v2(-166,558.42) -158.95,565.47 -64.53,565.47 -58.2,571.8 14.1,644.1 14.1,670.95 v2(21.15,678)
VCC: C1.2 J3.A4 J3.A9 J3.B4 J3.B9 U1.M15 U1.M16 U1.N2 U1.N3 U1.N4 U1.N5 U1.N15 | length 1371
  Top Layer w8: v2(-207.39,440.86) -207.39,582.42 -171.78,618.03 -139.41,618.03 v2(-79.43,678) U1.N5 U1.N4 U1.N3 U1.N2 ; J3.A4 -57.03,282.68 J3.B9 ; J3.B4 41.39,282.68 J3.A9 ; U1.M16 U1.M15 U1.N15 117.42,660.07 v2(118.69,658.8) 159.46,618.03 C1.2
  Fourth Layer w8: v2(-207.39,440.86) -207.39,407.39 -80.71,280.71 J3.B9 -29.47,306.3 13.83,306.3 J3.B4
  Bottom Layer w8: v2(-79.43,678) -79.43,712.83 -59.11,733.15 98.69,733.15 118.69,713.15 v2(118.69,658.8)
pads on no net: J1.M1 J1.M2 J2.M1 J2.M2 J3. U1.L17 U1.N16

## Polygon pours and split planes (outlines as drawn)
GND on Bottom Layer "GND_BOT" (solid, remove dead copper, pour order 6): -518,0 518,0 518,1356 -518,1356
GND on Top Layer "GND_TOP" (solid, remove dead copper, pour order 0): -518,0 518,0 518,1356 -518,1356
GND on Third Layer "GND_L3" (solid, remove dead copper, pour order 4): -518,0 518,0 518,1356 -518,1356
GND on Fourth Layer "GND_L4" (solid, remove dead copper, pour order 5): -518,0 518,0 518,1356 -518,1356
GND on Ground Plane 2 (split plane): 497.9,20.1 -497.9,20.1 -497.9,1335.9 497.9,1335.9
GND on Ground Plane 1 (split plane): 497.9,20.1 -497.9,20.1 -497.9,1335.9 497.9,1335.9

## Silkscreen, mask and mechanical layers (free items; w line width, h text height)
Bottom Overlay:
  rectangle: 200.54,421 447.54,571
  text "SBioML" at 445.32,839.62 h60
  text "RHD2164 USBC" at 445.32,723.15 h60
  text "Serial #" at 439.54,579 h40
Top Assembly:
  text "0.43 mm" at 2453,679 h60
  text "0.175 mm" at 2444,377 h60
  text "0.43 mm" at 2477,99 h60
Board Outline:
  the board outline again, w10
Manufacturing Notes:
  lines w10: 862.39,-728.35 862.39,1525.95 ; 862.39,-573.23 3213.66,-573.23 ; 862.39,-424.05 3213.66,-424.05 ; 862.39,-423.23 3213.66,-423.23 ; 862.39,-274.05 3213.66,-274.05 ; 862.39,25.95 3213.66,25.95 ; 1412.39,-728.35 1412.39,1525.94 ; 1412.39,-424.05 1912.39,-424.05 ; 1412.39,-124.05 1912.39,-124.05 ; 1912.39,-728.35 1912.39,1525.94 ; 2163.66,-723.23 2663.66,-723.23 ; 2163.66,-423.23 2663.66,-423.23 ; 2312.39,-728.35 2312.39,1525.94 ; 2312.39,-124.05 2862.39,-124.05 ; 2862.39,-728.35 2862.39,1525.94 ; 3154.61,1525.95 3213.66,1525.95 ; 3212.39,-728.35 3212.39,1525.94 3212.39,1675.95 ; 3213.66,175.95 862.39,175.95 862.39,325.95 3213.66,325.95 ; 3213.66,475.95 862.39,475.95 862.39,625.95 3213.66,625.95 ; 3213.66,775.95 862.39,775.95 862.39,925.95 3213.66,925.95 ; 3213.66,1075.95 862.39,1075.95 862.39,1225.95 3213.66,1225.95 ; 3213.66,1375.95 862.39,1375.95 862.39,1525.95 ; 3213.66,1675.95 862.39,1675.95 862.39,1525.95 ; 862.39,1525.95 1412.39,1525.95 ; 862.39,1525.95 3213.66,1525.95 ; 1412.39,1525.95 1412.39,1675.95 1912.39,1675.95 1912.39,1525.95 ; 1912.39,1525.95 2312.39,1525.95 ; 1912.39,1525.95 2312.39,1525.95 ; 2312.39,1525.95 2312.39,1675.95 2862.39,1675.95 2862.39,1525.95 ; 2862.39,1525.95 3213.66,1525.95 ; 2862.39,1525.95 3213.66,1525.95 ; 862.39,-723.23 3213.66,-723.23 862.39,-723.23 ; 862.39,-124.05 3213.66,-124.05 862.39,-124.05
  text "Type" at 1022.39,1587.22 h60
  text "Material" at 1552.39,1587.22 h60
  text "Weight" at 2032.39,1587.22 h60
  text "Dk" at 3012.39,1587.22 h60
  text "Thickness" at 2452.39,1585.95 h60
  text "Top Overlay" at 929.11,1425.94 h60
  text "0.01 mm" at 2453,1278.98 h60
  text "3.5" at 2989,1276.98 h60
  text "Top Solder" at 929.11,1275.34 h60
  text "0.0175 mm" at 2436,1170 h60
  text "0.5 oz" at 2044,1143 h60
  text "Top Layer" at 929.11,1125.95 h60
  text "(Plating to 1 oz)" at 2399,1099 h60
  text "2116 RC58%" at 1498,987 h60
  text "0.1195 mm" at 2465,982.98 h60
  text "4.45" at 2987,982.98 h60
  text "Dielectric 1" at 947,979.6 h60
  text "Second Layer" at 940,834.58 h60
  text "1 oz" at 2038,828 h60
  text "0.035 mm" at 2442,822.98 h60
  text "Core 1" at 947,686 h60
  text "Core" at 1586.37,686.59 h60
  text "4.6" at 2994,675.98 h60
  text "1 oz" at 2036,529 h60
  text "0.035 mm" at 2459,526.98 h60
  text "Third Layer" at 929.11,525.94 h60
  text "Dielectric 2" at 930,382.6 h60
  text "4.74" at 2962.63,379.8 h60
  text "7628 RC 46%" at 1510,378 h60
  text "1 oz" at 2026.59,236.86 h60
  text "0.035 mm" at 2449.59,234.85 h60
  text "Fourth Layer" at 929.11,225.94 h60
  text "Core 2" at 953.11,84.3 h60
  text "Core" at 1591,80 h60
  text "4.6" at 3001,73.98 h60
  text "Fifth Layer" at 950.73,-66.57 h60
  text "1 oz" at 2040.59,-78.14 h60
  text "0.035 mm" at 2463.59,-80.15 h60
  text "Dielectric 3" at 953.11,-222.66 h60
  text "0.1195 mm" at 2455,-224.02 h60
  text "2116 RC58%" at 1511,-227 h60
  text "4.45" at 2970,-228.02 h60
  text "0.0175 mm" at 2454,-332 h60
  text "0.5 oz" at 2042,-366 h60
  text "Sixth Layer" at 948.73,-366.57 h60
  text "(Plating to 1 oz)" at 2376,-393 h60
  text "Bottom Solder" at 923,-507 h60
  text "3.5" at 2985,-510 h60
  text "0.01 mm" at 2490,-532 h60
  text "Bottom Overlay" at 925,-658 h60